# Altium PCB PCB.PcbDoc (part 3 of 3)
Units mm, origin at the board's own origin, x right, y up, seen from the top; angles counter-clockwise.
Board outline 202.56 x 137.16 mm, 4 copper layers (Top Layer, Layer 1, Layer 2, Bottom Layer), stack 0.603 mm thick; 171 components, 95 nets, 481 pads, 76 vias.
Unrouted connection lines stored in the file: 155.
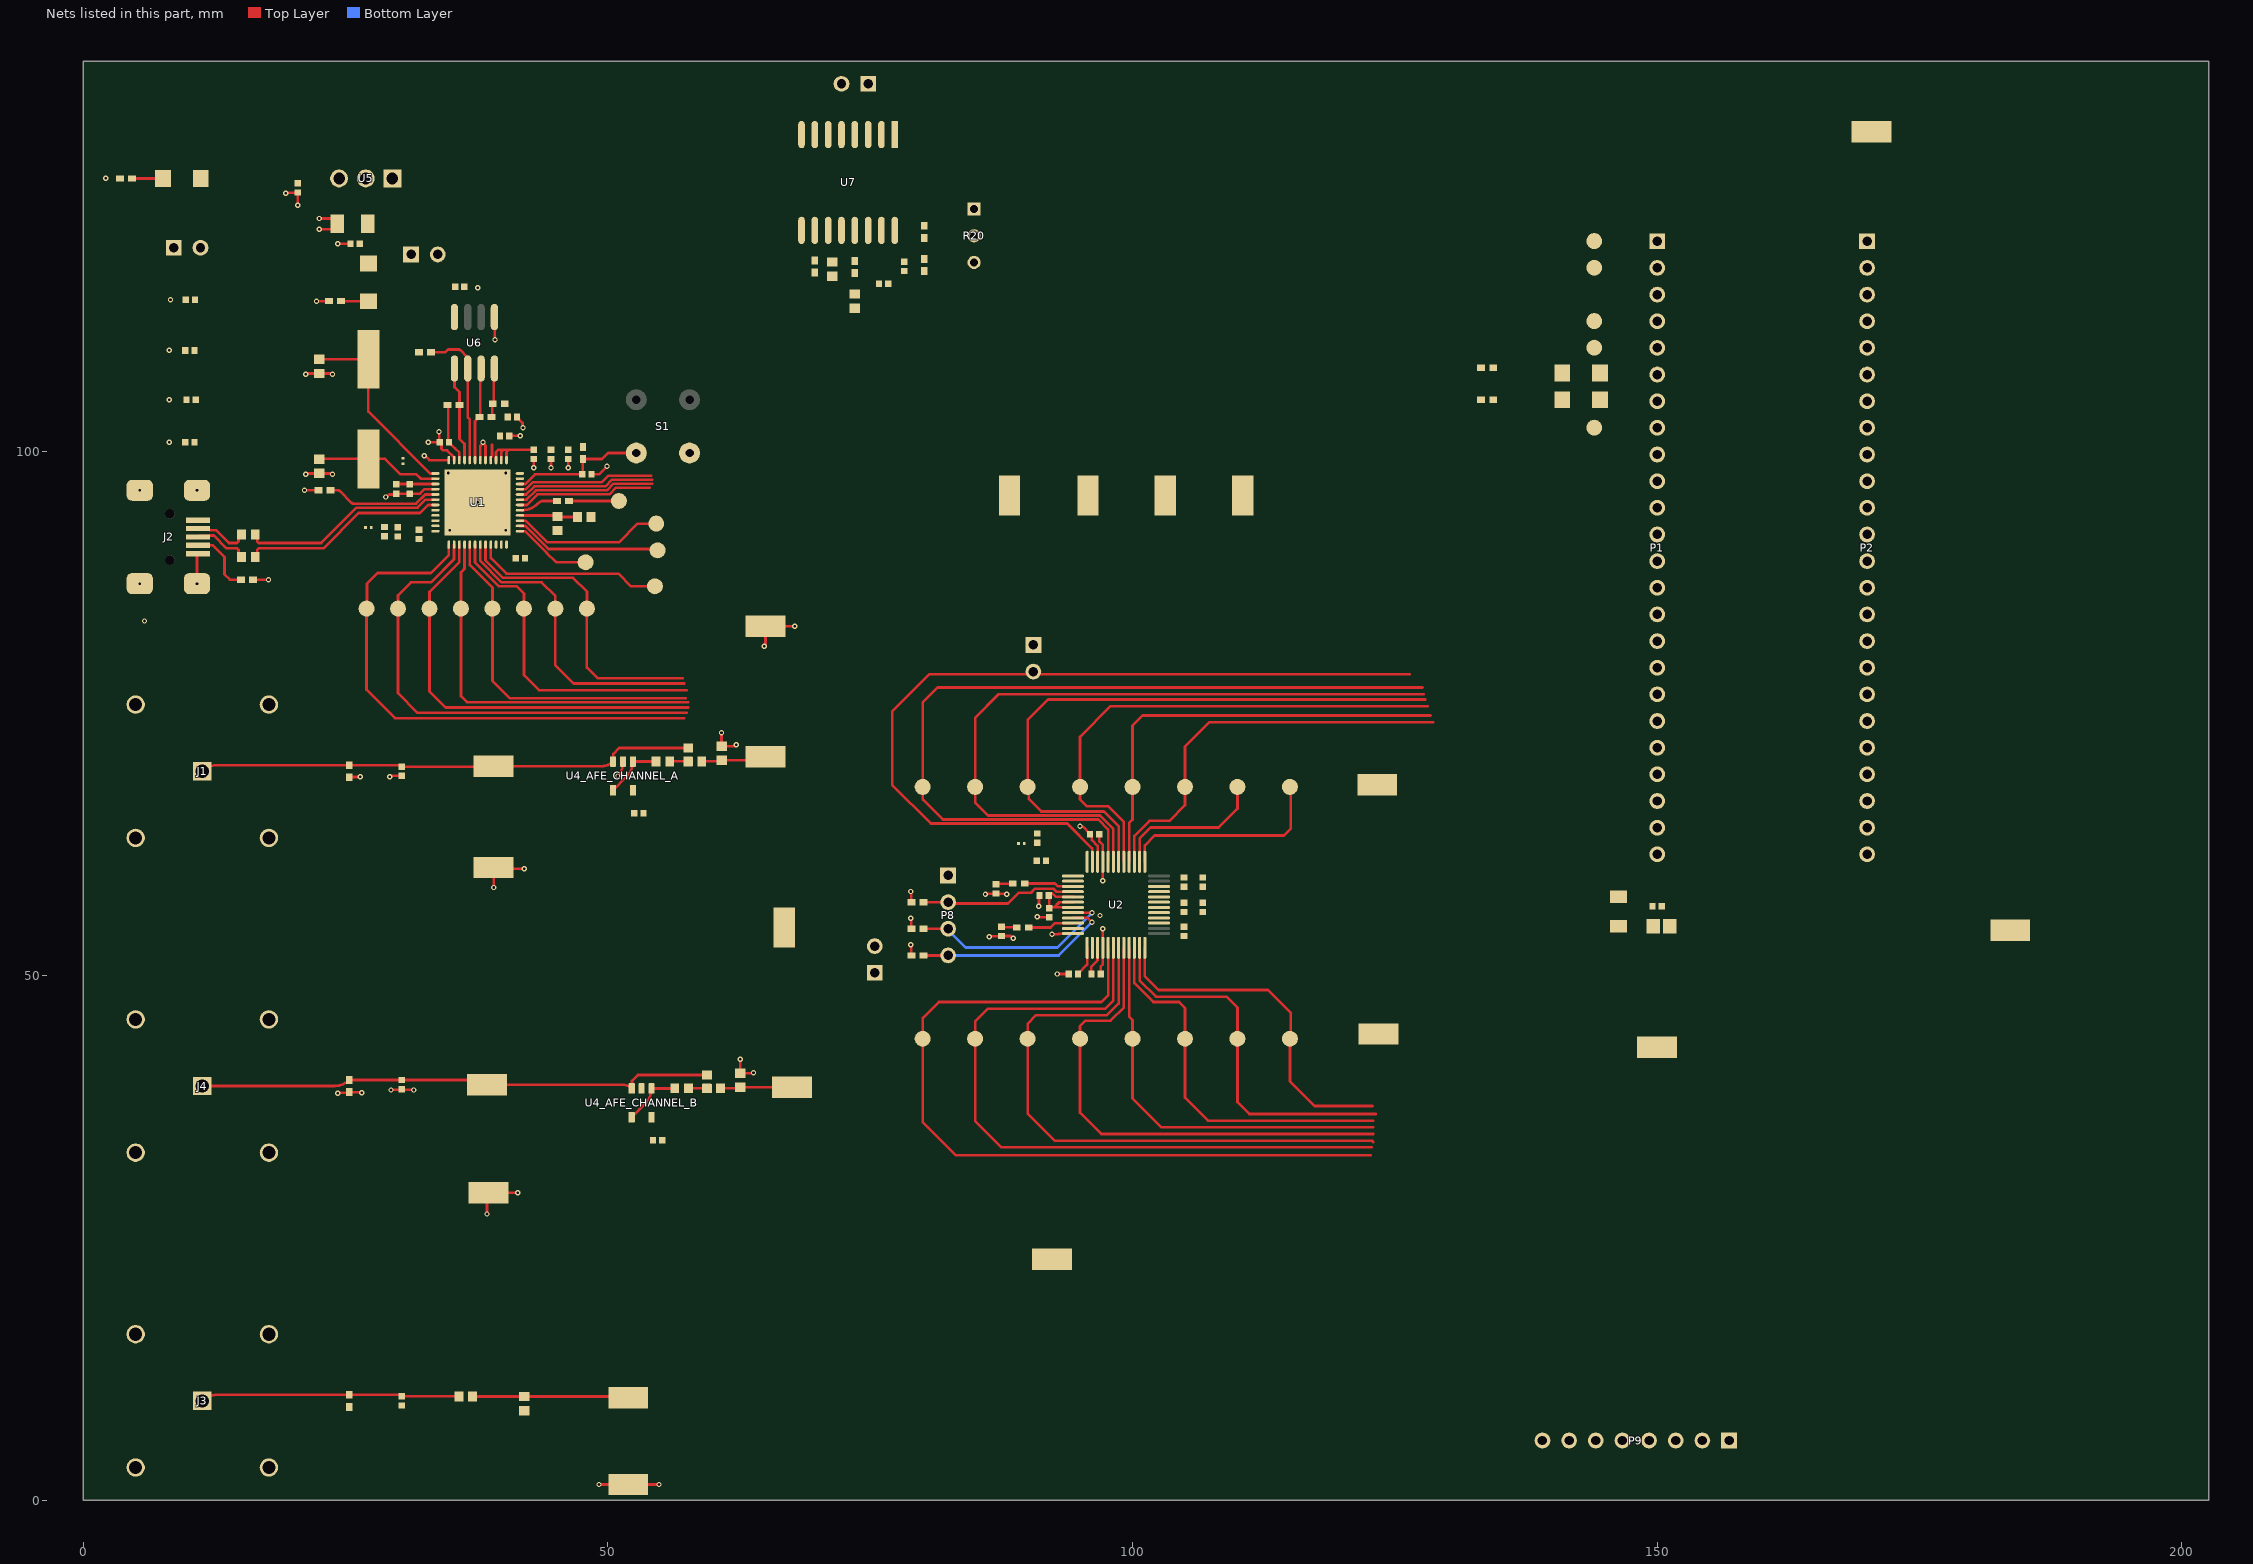
[diagram p4: the nets of this part, all layers, seen from the top]

## Part data (continued)
R22: library part AC0603FR-0775RL, "RES SMD 75 OHM 1% 1/10W 0603", Device Package="0603 (1608 Metric)", manufacturer=Yageo, Operating Temperature="-55°C ~ 155°C", Power (Watts)="0.1W, 1/10W", Ratings=AEC-Q200, Supplier Device Package=0603, Supplier Part Number 1=YAG3630CT-ND, Temperature Coefficient=±100ppm/°C, Tolerance=±1%, componentlink1description=Datasheet, componentlink1url=https://www.yageo.com/upload/media/product/productsearch/datasheet/rchip/PYu-AC_51_RoHS_L_7.pdf, componentlink2description="DigiKey Link", componentlink2url=https://www.digikey.com/en/products/detail/yageo/AC0603FR-0775RL/5896285, Composition="Thick Film", Features="Automotive AEC-Q200, Moisture Resistant", Height - Seated (Max)="0.022\" (0.55mm)", lastupdated="2022-09-18 12:28:42 PM", Lifecycle Status=Active, Minimum Order=1, Number of Terminations=2, Package / Case="0603 (1608 Metric)", packaging=CutTape, Part Number=AC0603FR-0775RL, Part Status=Active, partid=15287, price=0.01, Resistance="75 Ohms", series=AC, Size / Dimension="0.063\" L x 0.031\" W (1.60mm x 0.80mm)", Supplier 1=DigiKey
R26: library part RC0402FR-0724RL, "RES 24 OHM 1% 1/16W 0402", Device Package="0402 (1005 Metric)", manufacturer=Yageo, Operating Temperature="-55°C ~ 155°C", Power (Watts)="0.063W, 1/16W", Supplier Device Package=0402, Supplier Part Number 1=YAG3073CT-ND, Temperature Coefficient=±100ppm/°C, Tolerance=±1%, componentlink1description=Datasheet, componentlink1url=https://www.yageo.com/upload/media/product/productsearch/datasheet/rchip/PYu-RC_Group_51_RoHS_L_10.pdf, componentlink2description="DigiKey Link", componentlink2url=https://www.digikey.com/en/products/detail/yageo/RC0402FR-0724RL/5280933, Composition="Thick Film", Features="Moisture Resistant", Height - Seated (Max)="0.016\" (0.40mm)", lastupdated="2022-09-19 1:15:03 PM", Lifecycle Status=Active, Minimum Order=1, Number of Terminations=2, Package / Case="0402 (1005 Metric)", packaging=CutTape, Part Number=RC0402FR-0724RL, Part Status=Active, partid=2811, price=0.01, Resistance="24 Ohms", series=RC_L, Size / Dimension="0.039\" L x 0.020\" W (1.00mm x 0.50mm)", Supplier 1=DigiKey
R27 R28 R29: library part RMCF0402FT1M00, "RES 1M OHM 1% 1/16W 0402", Device Package="0402 (1005 Metric)", manufacturer="Stackpole Electronics Inc", Operating Temperature="-55°C ~ 155°C", Power (Watts)="0.063W, 1/16W", Ratings=AEC-Q200, Supplier Device Package=0402, Supplier Part Number 1=RMCF0402FT1M00CT-ND, Temperature Coefficient=±100ppm/°C, Tolerance=±1%, componentlink1description=Datasheet, componentlink1url=https://www.seielect.com/catalog/sei-rmcf_rmcp.pdf, componentlink2description="DigiKey Link", componentlink2url=https://www.digikey.com/en/products/detail/stackpole-electronics-inc/RMCF0402FT1M00/1761748, Composition="Thick Film", Features="Automotive AEC-Q200", Height - Seated (Max)="0.016\" (0.40mm)", lastupdated="2022-09-19 1:14:56 PM", Lifecycle Status=Active, Minimum Order=1, Number of Terminations=2, Package / Case="0402 (1005 Metric)", packaging=CutTape, Part Number=RMCF0402FT1M00, Part Status=Active, partid=4912, price=0.01, Resistance="1 MOhms", series=RMCF, Size / Dimension="0.039\" L x 0.020\" W (1.00mm x 0.50mm)", Supplier 1=DigiKey
R30 R31: library part FC0402E25R0BST0, "RES 25 OHM 0.1% 1/20W 0402", Device Package="0402 (1005 Metric)", manufacturer="Vishay Thin Film", Operating Temperature="-55°C ~ 155°C", Power (Watts)="0.05W, 1/20W", Supplier Device Package=0402, Supplier Part Number 1=764-1327-1-ND, Temperature Coefficient=±25ppm/°C, Tolerance=±0.1%, componentlink1description=Datasheet, componentlink1url=http://www.vishay.com/docs/60093/fcseries.pdf, componentlink2description="DigiKey Link", componentlink2url=http://digikey.com/product-detail/en/vishay-thin-film/FC0402E25R0BST0/764-1327-1-ND/7103111, Composition="Thin Film", Features="RF, High Frequency", Height - Seated (Max)="0.015\" (0.38mm)", lastupdated="2022-09-18 12:21:41 PM", Lifecycle Status=Active, Minimum Order=1, Number of Terminations=2, Package / Case="0402 (1005 Metric)", packaging=TapeAndReel, Part Number=FC0402E25R0BST0, Part Status=Active, partid=11457, price=2.00, Resistance="25 Ohms", series=FC, Size / Dimension="0.042\" L x 0.022\" W (1.07mm x 0.56mm)", Supplier 1=DigiKey
S1: "SWITCH PUSH SPST-NO 0.4VA 28V", Color - Actuator/Cap=Black, Current Rating (Amps)="0.4VA (AC/DC)", manufacturer="NKK Switches", Operating Temperature="-30°C ~ 85°C", Supplier Part Number 1=360-2703-ND, Voltage Rating - AC=28V, Actuator Type="Round, Button", Circuit=SPST-NO, componentlink1description=Datasheet, componentlink1url=https://www.nkkswitches.com/pdf/Apushbuttons.pdf, componentlink2description="DigiKey Link", componentlink2url=//digikey.com/product-detail/en/nkk-switches/AB11AH-HA/360-2703-ND/1056050, Features="Sealed - Fully", lastupdated="2019-12-12 8:13:11 AM", Lifecycle Status=0, Minimum Order=1, Mounting Type="Through Hole, Right Angle", packaging=Tray, Part Number=AB11AH-HA, Part Status=Active, price=5.00, series=AB, Supplier 1=DigiKey, Switch Function=Off-Mom, Termination Style="PC Pin", Type=Standard, Voltage Rating - DC=28V
TP1 TP2 TP3 TP4 TP5 TP9 TP24 TP25 TP26 TP45 TP46 TP47 TP48 TP50 TP51 TP52 TP53 TP54 TP55 TP56: library part CMP-1672-00008-1, "Test Point, 1 Position SMD, RoHS, Tape and Reel", Package Quantity=1000, componentlink1description="Manufacturer URL", componentlink1url=http://www.keyelco.com/, componentlink2description=Datasheet, componentlink2url=http://www.keyelco.com/product-pdf.cfm?p=1357, Contact Plating=Silver, DatasheetVersion=03/2014, Mount="Surface Mount", Mounting Technology="Surface Mount", PackageDescription="1-Pin Surface Mount Device, Body 3.81 x 2.03 mm", PackageReference=5019, packaging="Tape and Reel", Pins=1, RoHSCompliant=True
TP6 TP7 TP8 TP10 TP11 TP12 TP13 TP14 TP15 TP16 TP17 TP18 TP19 TP20 TP21 TP27 TP28 TP29 TP30 TP31 TP32 TP33 TP34 TP35 TP36 TP37 TP38 TP39 TP40 TP41 TP42 TP43 TP44 TP49: library part TP1
U1: library part CMP-0078-00034-4, "IC HS USB TO UART/FIFO 48QFN", Case/Package=QFN, Max Operating Temperature=85°C, Max Supply Voltage=3.63V, Min Operating Temperature=-40°C, Min Supply Voltage=2.97V, Nominal Supply Current=60mA, Operating Supply Current=24mA, Operating Supply Voltage=3.3V, Package Quantity=1, Data Rate=12Mbps, Height=1.4mm, Interface=UART, Lead Free="Lead Free", Length=7mm, Mount="Surface Mount", Number of Channels=1, Number of Pins=48, packaging="Tape and Reel", Radiation Hardening=No, REACH SVHC="No SVHC", Weight=0.005309oz, Width=7mm
U2: library part CMP-0313-02378-2, "Dual 8-Bit Analog-to-Digital Converter with Parallel Interface, 40MSPS, -40 to +85 degC, ST-48, Pb-Free, Tray", Generic Part Number=AD9288-40, manufacturer="Analog Devices", Channels=2, componentlink1description="Manufacturer URL", componentlink1url=http://www.analog.com/en/index.html, componentlink2description=Datasheet, componentlink2url=http://www.analog.com/static/imported-files/data_sheets/AD9288.pdf, ComponentLink3Description="Package Specification", ComponentLink3URL=http://www.analog.com/static/imported-files/packages/PKG_PDF/LQFP%28ST%29/ST_48.pdf, ComponentLink4Description="Product URL", ComponentLink4URL=http://www.analog.com/en/analog-to-digital-converters/ad-converters/ad9288/products/product.html, DatasheetVersion=Rev.C, Interface=Par, Mounting Technology="Surface Mount", PackageDescription="48-Pin Thin Quad Flat Pack 0.5 mm Pitch", PackageReference=ST-48, PackageVersion=revA, Packing=Tray, PartNumber=AD9288BSTZ-40, Resolution (Bits)=8, RoHS=Y, Throughput Rate (SPS)=40M
U4_AFE_CHANNEL_A U4_AFE_CHANNEL_B: library part CMP-0055-01272-3, "1.7 GHz, Ultra Low Distortion, Wideband Op Amp, 5-pin SOT-23, Pb-Free", manufacturer="Texas Instruments", Package Reference=DBV0005A, PackageTopMarking=A83A*XTT, PowerWise=Y, componentlink1description="Datasheet URL", componentlink1url=http://www.ti.com/general/docs/lit/getliterature.tsp?genericPartNumber=LMH6702&fileType=pdf, CompType=Amplifiers, PackageDescription="Molded SOT-23, .115 x .063 x .040 in Body, 5 Lead, .0375 in Pitch", PinCount=5, RoHS=Y
U5: library part CMP-0244-00471-1, "Fixed Low Drop Positive Voltage Regulator, 3.3V, 3-Pin TO-220", componentlink1description="Manufacturer URL", componentlink1url=http://www.st.com, componentlink2description=Datasheet, componentlink2url=http://www.st.com/internet/com/TECHNICAL_RESOURCES/TECHNICAL_LITERATURE/DATASHEET/CD00000544.pdf, ComponentLink3Description="Package Specification", ComponentLink3URL=http://www.st.com/internet/com/TECHNICAL_RESOURCES/TECHNICAL_LITERATURE/PACKAGE_INFORMATION/CD00004649.pdf, DatasheetVersion=1/11/2011, PackageDescription="TO, Thru-Hole, Vertical, Heatsink Mounted; 3 In-Line Leads; Pitch 2.54 mm", PackageReference=TO220, PackageVersion=ver3.0
U6: library part CMP-0162-00132-1, "2K, 128x16-bit, 2.5V Microwire Serial EEPROM, 8-Pin SOIC 150mil, Commercial Temperature, Tape and Reel", Code_IPC=SOIC127P600-8, Code_JEDEC=MS-012, ComponentAvailability="Unknown. Contact manufacturer to determine status.", DatasheetVersion="revF, May-2008", PackageDescription="8-Lead Plastic Small Outline (SN) - Narrow, 3.90mm Body [SOIC]", PackageReference=SOIC-SN8, PackageVersion="revBB, Aug-2009"
U7: library part CMP-82923-000050-1, "CURRENT SENSOR", Case/Package=SOIC, Current Sensing=15A, Frequency=120kHz, Max Operating Temperature=125°C, Max Supply Current=16mA, Min Operating Temperature=-40°C, Accuracy=1.6%, Linearity=0.75%, Mount="Surface Mount", Number of Channels=1, Number of Pins=16, packaging="Cut Tape", Polarity=Bidirectional, Response Time=4us, RoHS Compliant=Yes, Sensitivity=90mV/A
Y1: library part ABLS-12.000MHZ-20-B-3-H-T, "CRYSTAL 12.0000MHZ 20PF SMD", ESR (Equivalent Series Resistance)="50 Ohms", Frequency Stability=±35ppm, Frequency Tolerance=±25ppm, Load Capacitance=20pF, manufacturer="Abracon LLC", Operating Mode=Fundamental, Operating Temperature="-20°C ~ 70°C", Package / Case=HC-49/US, Supplier Part Number 1=535-15006-1-ND, componentlink1description=Datasheet, componentlink1url=https://abracon.com/Resonators/abls.pdf, componentlink2description="DigiKey Link", componentlink2url=https://www.digikey.com/en/products/detail/abracon-llc/ABLS-12-000MHZ-20-B-3-H-T/9997914, Frequency="12 MHz", Height - Seated (Max)="0.165\" (4.20mm)", lastupdated="2022-07-21 4:44:16 AM", Lifecycle Status=Active, Minimum Order=1, Mounting Type="Surface Mount", packaging=TapeAndReel, Part Number=ABLS-12.000MHZ-20-B-3-H-T, Part Status=Active, partid=124, price=0.09, series=ABLS, Size / Dimension="0.449\" L x 0.185\" W (11.40mm x 4.70mm)", Supplier 1=DigiKey, Type="MHz Crystal"

## Via types
v1: diameter 0.508, hole 0.254, Top Layer to Bottom Layer, 76 vias

## Nets (pads, with @x,y where several pads share a name; then routed paths per layer and width w, separated by ;. In a path a pad name is that pad's centre, name@x,y a point inside that pad or via, vN(x,y) a via of type N, cw(c..) or ccw(c..) an arc to the next point about the centre after c; other vN are vias at no path point)
AC4: R15.1 R23.1 U1.28 | length 5.5
  Top Layer w0.254: U1.28@41.617,93.873 45.095,93.873 R23.1@45.212,93.756 45.242,93.726 R15.1@47.102,93.726
ADC_A_D0: P2.24 TP6.1 U2.37 | length 20.1
  Top Layer w0.254: U2.37@101.175,60.869 101.175,62.44 102.108,63.373 114.427,63.373 115.062,64.008 115.062,67.938 TP6.1@115,68
ADC_A_D1: P2.23 TP8.1 U2.38 | length 14.8
  Top Layer w0.254: U2.38@100.675,60.869 100.675,63.083 101.727,64.135 108.204,64.135 110,65.931 TP8.1@110,68
ADC_A_D2: P2.22 TP11.1 U2.39 | length 38.7
  Top Layer w0.254: U2.39@100.175,60.869 100.175,63.345 101.6,64.77 103.505,64.77 105,66.265 TP11.1@105,68 105,71.853 107.315,74.168 128.651,74.168
ADC_A_D3: P2.21 TP13.1 U2.40 | length 41.9
  Top Layer w0.254: U2.40@99.675,60.869 99.675,64.556 100,64.881 TP13.1@100,68 100,73.838 100.965,74.803 128.397,74.803
ADC_A_D4: P2.20 TP15.1 U2.41 | length 49.2
  Top Layer w0.254: U2.41@99.175,60.869 99.175,64.655 97.663,66.167 95.631,66.167 94.996,66.802 94.996,67.996 TP15.1@95,68 95,72.775 97.917,75.692 128.143,75.692
ADC_A_D5: P2.19 TP17.1 U2.42 | length 59.3
  Top Layer w0.254: U2.42@98.675,60.869 98.675,64.266 97.282,65.659 91.313,65.659 90.115,66.857 90.115,67.885 TP17.1@90,68 90,74.379 91.948,76.327 127.889,76.327
ADC_A_D6: P2.18 TP19.1 U2.43 | length 69.1
  Top Layer w0.254: U2.43@98.175,60.869 98.175,64.004 96.901,65.278 86.233,65.278 85,66.511 TP19.1@85,68 85,74.586 87.249,76.835 127.762,76.835
ADC_A_D7: P2.17 TP21.1 U2.44 | length 79.4
  Top Layer w0.254: U2.44@97.675,60.869 97.675,63.965 96.743,64.897 81.915,64.897 80.01,66.802 80.01,67.99 TP21.1@80,68 80,76.063 81.407,77.47 127.635,77.47
ADC_A_ENC: P2.12 P5.2 U2.47 | length 80.6
  Top Layer w0.254: U2.47@96.175,60.869 96.175,61.781 96.152,61.804 96.152,62.142 93.778,64.516 80.772,64.516 77.089,68.199 77.089,75.184 80.645,78.74 126.405,78.74
ADC_A_IN: C49_AFE_CHANNEL_A.2 R16_AFE_CHANNEL_A.2 TP50.1 U2.2 | length 6.2
  Top Layer w0.254: R16_AFE_CHANNEL_A.2@58.943,70.445 60.623,70.445 ccw(c60.623,70.742) C49_AFE_CHANNEL_A.2@60.833,70.532 64.218,70.532 ccw(c64.218,71.672) TP50.1@65.024,70.866
ADC_B_D0: P1.12 TP7.1 U2.24 | length 33.4
  Top Layer w0.254: U2.24@101.175,52.669 101.175,49.955 102.489,48.641 112.903,48.641 115.062,46.482 115.062,44.062 TP7.1@115,44 115,39.94 117.348,37.592 122.868,37.592
ADC_B_D1: P1.13 TP10.1 U2.23 | length 36.2
  Top Layer w0.254: U2.23@100.675,52.669 100.675,49.566 102.235,48.006 108.966,48.006 110,46.972 TP10.1@110,44 110,37.955 111.125,36.83 123.19,36.83
ADC_B_D2: P1.14 TP12.1 U2.22 | length 36.6
  Top Layer w0.254: U2.22@100.175,52.669 100.175,49.304 101.981,47.498 104.438,47.498 105,46.936 TP12.1@105,44 105,38.383 107.188,36.195 122.936,36.195
ADC_B_D3: P1.17 TP14.1 U2.21 | length 38.6
  Top Layer w0.254: U2.21@99.675,52.669 99.675,46.121 100,45.796 TP14.1@100,44 100,38.303 102.743,35.56 122.936,35.56
ADC_B_D4: P1.18 TP16.1 U2.20 | length 47.6
  Top Layer w0.254: U2.20@99.175,52.669 99.175,46.978 97.917,45.72 95.504,45.72 95,45.216 TP16.1@95,44 95,36.953 97.028,34.925 122.936,34.925
ADC_B_D5: P1.19 TP18.1 U2.19 | length 57.4
  Top Layer w0.254: U2.19@98.675,52.669 98.675,47.367 97.551,46.243 90.82,46.243 90,45.423 TP18.1@90,44 90,36.873 92.583,34.29 122.809,34.29 122.936,34.163
ADC_B_D6: P1.20 TP20.1 U2.18 | length 67.4
  Top Layer w0.254: U2.18@98.175,52.669 98.175,47.629 97.409,46.863 86.233,46.863 85,45.63 TP20.1@85,44 85,36.158 87.503,33.655 122.809,33.655
ADC_B_D7: P1.21 TP49.1 U2.17 | length 77
  Top Layer w0.254: U2.17@97.675,52.669 97.675,48.145 97.028,47.498 81.534,47.498 80.01,45.974 80.01,44.01 TP49.1@80,44 80,36.078 83.185,32.893 122.682,32.893
ADC_B_ENC: P1.3 P7.2 U2.14
ADC_B_IN: C49_AFE_CHANNEL_B.2 R16_AFE_CHANNEL_B.2 TP51.1 U2.11 | length 6.9
  Top Layer w0.254: R16_AFE_CHANNEL_B.2@60.721,39.283 62.401,39.283 ccw(c62.401,39.58) C49_AFE_CHANNEL_B.2@62.611,39.37 TP51.1@67.564,39.37
ADC_DFS: P8.2 R34.2 U2.4 | length 15
  Top Layer w0.254: R34.2@80.077,57.023 P8.2@82.423,57.023 82.55,56.896 88.138,56.896 89.154,57.912 90.299,57.912 90.692,58.305 92.442,58.305 92.728,58.019 U2.4@94.325,58.019
ADC_S1: P8.3 R32.2 U2.8 | length 20.1
  Top Layer w0.254: R32.2@80.077,54.483 P8.3@82.423,54.483 ; U2.8@94.325,56.019 95.756,56.019 95.768,56.007 v1(96.139,56.007)
  Bottom Layer w0.254: P8.3@82.423,54.483 82.423,54.356 84.074,52.705 92.828,52.705 96.13,56.007 v1(96.139,56.007)
ADC_S2: P8.4 R33.2 U2.9 | length 19.4
  Top Layer w0.254: R33.2@80.077,51.943 P8.4@82.423,51.943 ; U2.9@94.325,55.519 95.729,55.519 96.13,55.118 v1(96.139,55.118)
  Bottom Layer w0.254: P8.4@82.423,51.943 92.964,51.943 v1(96.139,55.118)
EEPROM_CLK: R10.1 U1.44 U6.2 | length 13.7
  Top Layer w0.254: R10.1@33.158,109.436 34.507,109.436 34.762,109.691 35.758,109.691 cw(c35.758,109.437) 35.937,109.618 36.574,108.981 cw(c36.393,108.802) U6.2@36.647,108.803 ; U6.2@36.647,108.802 U6.2@36.647,107.875 36.647,103.192 36.842,102.998 U1.44@36.842,99.148
EEPROM_CS: R11.1 U1.45 U6.1 | length 9.1
  Top Layer w0.254: U6.1@35.377,107.875 35.377,106.101 35.86,105.618 R11.1@35.86,104.394 35.86,101.173 36.342,100.691 U1.45@36.342,99.148
EEPROM_DI: R12.2 U1.43 U6.3 | length 9
  Top Layer w0.254: U1.43@37.342,99.148 37.342,102.835 37.51,103.003 37.51,103.078 37.683,103.251 R12.2@37.758,103.251 37.838,103.331 37.838,107.795 U6.3@37.917,107.875
EEPROM_DO: R9.1 R12.1 U6.4 | length 4.7
  Top Layer w0.254: R12.1@38.908,103.251 38.968,103.311 38.968,104.461 R9.1@39.028,104.521 39.108,104.601 39.108,107.795 U6.4@39.187,107.875
FPGA_ADC0: P1.15 U7.12
FPGA_ADC1: C35.2 P1.16 R22.2 TP9.1 | length 14.9
  Top Layer w0.254: R22.2@37.099,9.906 C35.2@42.037,9.906 51.636,9.906 cw(c51.636,9.472) TP9.1@51.943,9.779
FTDI_AC7: P1.2 TP33.1 U1.31 | length 13.2
  Top Layer w0.254: U1.31@41.617,95.373 42.256,95.373 43.149,96.266 49.911,96.266 50.546,96.901 54.229,96.901
FTDI_AC8: P1.4 TP34.1 U1.32 | length 13.2
  Top Layer w0.254: U1.32@41.617,95.873 41.619,95.875 42.219,95.875 42.991,96.647 49.753,96.647 50.388,97.282 54.229,97.282
FTDI_AC9: P1.5 TP35.1 U1.33 | length 13
  Top Layer w0.254: U1.33@41.617,96.373 41.619,96.375 42.181,96.375 42.834,97.028 49.403,97.028 50.038,97.663 54.102,97.663
FTDI_AD0: P2.9 TP37.1 U1.13 | length 51.5
  Top Layer w0.254: U1.13@34.842,91.098 34.842,90.087 33.147,88.392 28.067,88.392 27.051,87.376 27.051,85.051 TP37.1@27,85 27,77.267 29.718,74.549 57.277,74.549
FTDI_AD1: P2.8 TP38.1 U1.14 | length 45.8
  Top Layer w0.254: U1.14@35.342,91.098 35.342,89.698 33.147,87.503 31.242,87.503 30,86.261 TP38.1@30,85 30,76.934 31.877,75.057 57.531,75.057
FTDI_AD2: P2.7 TP39.1 U1.15 | length 40.5
  Top Layer w0.254: U1.15@35.842,91.098 35.842,89.436 33,86.594 TP39.1@33,85 33,77.109 34.544,75.565 57.658,75.565
FTDI_AD3: P2.6 TP40.1 U1.16 | length 36.5
  Top Layer w0.254: U1.16@36.342,91.098 36.342,88.793 36,88.451 TP40.1@36,85 36,76.649 36.576,76.073 57.658,76.073
FTDI_AD4: P2.5 TP41.1 U1.17 | length 33
  Top Layer w0.254: U1.17@36.842,91.098 36.842,89.142 39,86.984 TP41.1@39,85 39,78.094 40.64,76.454 57.404,76.454
FTDI_AD5: P2.4 TP42.1 U1.18 | length 31.5
  Top Layer w0.254: U1.18@37.342,91.098 37.342,89.404 39.624,87.122 41.318,87.122 42,86.44 TP42.1@42,85 42,78.65 43.434,77.216 57.531,77.216
FTDI_AD6: P2.3 TP43.1 U1.19 | length 29.7
  Top Layer w0.254: U1.19@37.842,91.098 37.842,89.539 39.878,87.503 43.688,87.503 45,86.191 TP43.1@45,85 45,79.587 46.736,77.851 57.277,77.851
FTDI_AD7: P2.2 TP44.1 U1.20 | length 29.2
  Top Layer w0.254: U1.20@38.342,91.098 38.342,89.578 39.996,87.923 46.697,87.923 48.006,86.614 48.006,85.006 TP44.1@48,85 48,79.381 49.022,78.359 57.15,78.359
FTDI_CLK_OUT: P2.16 R26.2 TP29.1 | length 4.8
  Top Layer w0.254: R26.2@46.295,95.25 TP29.1@51.054,95.25
FTDI_OE_n: P1.1 TP32.1 U1.30 | length 13
  Top Layer w0.254: U1.30@41.617,94.873 42.295,94.873 43.299,95.877 50.141,95.877 50.784,96.52 53.975,96.52
FTDI_OSCI: C13.2 U1.1 Y1.2 | length 18.5
  Top Layer w0.254: C13.2@22.479,108.752 22.49,108.763 Y1.2@27.178,108.763 27.178,103.759 33.064,97.873 U1.1@33.567,97.873
FTDI_OSCO: C14.2 U1.2 Y1.1 | length 11.9
  Top Layer w0.254: C14.2@22.479,99.227 22.515,99.263 Y1.1@27.178,99.263 28.753,99.263 30.226,97.79 31.75,97.79 32.167,97.373 U1.2@33.567,97.373
FTDI_RD_n: P2.14 TP27.1 U1.26 | length 14.1
  Top Layer w0.254: U1.26@41.617,92.873 41.619,92.871 42.13,92.871 44.323,90.678 54.61,90.678 TP27.1@54.737,90.551
FTDI_RESET_n: C10.2 R8.1 S1.3 U1.34 | length 13.5
  Top Layer w0.254: U1.34@41.888,96.873 U1.34@41.617,96.873 41.619,96.875 42.142,96.875 43.057,97.79 C10.2@47.566,97.79 47.596,97.82 C10.2@47.596,97.84 ; C10.2@47.556,97.8 C10.2@47.596,97.84 ; S1.3@52.705,99.822 50.012,99.822 49.437,99.247 R8.1@47.625,99.247 47.596,99.218 C10.2@47.596,97.84
FTDI_RXF_n: P2.13 TP31.1 U1.21 | length 18
  Top Layer w0.254: U1.21@38.842,91.098 38.842,89.809 40.332,88.319 51,88.319 52.197,87.122 TP31.1@54.483,87.122
FTDI_TXE_n: P2.11 TP28.1 U1.25 | length 7.5
  Top Layer w0.254: U1.25@41.617,92.373 U1.25@41.617,92.373 42.091,92.371 44.131,90.332 ccw(c44.31,90.511) 44.145,90.318 44.197,90.274 cw(c44.031,90.081) 44.208,90.264 ; 44.208,90.263 45.013,89.48 ccw(c45.19,89.662) 45.19,89.408 TP28.1@47.879,89.408
FTDI_VPHY: C15.2 C16.2 FB1.1 U1.3 | length 3.7
  Top Layer w0.254: C15.2@29.845,96.833 29.883,96.871 33.565,96.871 U1.3@33.567,96.873
FTDI_VPLL: C23.2 C24.2 FB2.1 U1.8
FTDI_WR_n: P2.10 TP30.1 U1.27 | length 14.6
  Top Layer w0.254: U1.27@41.617,93.373 41.619,93.371 42.169,93.371 43.576,91.963 44.227,91.313 51.054,91.313 52.832,93.091 TP30.1@54.61,93.091
GND: C1.1 C2.1 C3.1 C4.1 C5.1 C6.1 C7.1 C8.1 C9.1 C10.1 C11.1 C12.1 C13.1 C14.1 C15.1 C16.1 C17.1 C18.1 C19.1 C20.1 C21.1 C22.1 C23.1 C24.1 C25.1 C26.1 C27.1 C28.1 C29.1 C30.1 C31.1 C32.1 C33.1 C34.1 C35.1 C36_AFE_CHANNEL_A.1 C36_AFE_CHANNEL_B.1 C37.1 C38.1 C39.1 C40.1 C41.1 C42.1 C43.1 C44.1 C45.1 C46.1 C47.1 C48.1 C49_AFE_CHANNEL_A.1 C49_AFE_CHANNEL_B.1 J1.2 J1.3 J1.4 J1.5 J2.5 J2.S J3.2 J3.3 J3.4 J3.5 J4.2 J4.3 J4.4 J4.5 P2.1 P3.1 P4.2 P5.1 P7.1 P8.1 P9.7 P9.8 R3.1 R4.1 R6.1 R7.1 R13.1 R14.1 R20.3 R21.1 R27.1 R28.1 R29.1 R32.1 R33.1 R34.1 S1.1 TP1.1 TP2.1 TP3.1 TP4.1 TP25.1 TP26.1 TP45.1 TP46.1 TP47.1 TP48.1 TP52.1 TP53.1 TP54.1 TP55.1 TP56.1 U1.4 U1.9 U1.10 U1.11 U1.22 U1.23 U1.35 U1.36 U1.41 U1.42 U1.47 U1.48 U1.49 U2.1 U2.12 U2.16 U2.27 U2.29 U2.32 U2.34 U2.45 U4_AFE_CHANNEL_A.2 U4_AFE_CHANNEL_B.2 U5.1 U6.5 U7.9 | length 99.7
  Top Layer w0.254: v1(10.843,87.371) 10.843,90.126 J2.5@10.938,90.221 ; R14.1@16.196,87.757 v1(17.653,87.757) ; v1(19.304,124.587) 19.338,124.621 20.413,124.621 C5.1@20.447,124.655 v1(20.447,123.444) ; v1(21.082,96.266) R7.1@22.412,96.266 ; v1(21.209,97.79) 21.278,97.79 21.365,97.877 C14.1@22.479,97.877 23.593,97.877 23.68,97.79 v1(23.749,97.79) ; v1(21.209,107.315) 21.278,107.315 21.365,107.402 C13.1@22.479,107.402 23.593,107.402 23.68,107.315 v1(23.749,107.315) ; v1(22.225,114.3) R3.1@23.428,114.3 ; v1(22.479,121.158) 23.696,121.158 C6.1@24.204,121.666 23.696,122.174 v1(22.479,122.174) ; v1(24.257,119.761) C12.1@25.468,119.761 ; v1(24.272,38.803) 24.321,38.851 25.278,38.851 R29.1@25.347,38.92 25.376,38.891 26.514,38.891 v1(26.543,38.862) ; R27.1@25.347,68.92 25.368,68.94 26.395,68.94 v1(26.416,68.961) ; v1(28.838,95.631) 28.907,95.631 29.144,95.868 29.76,95.868 C15.1@29.845,95.953 C16.1@31.115,95.953 32.092,95.953 32.512,96.373 U1.4@33.567,96.373 ; v1(29.21,68.961) 29.279,68.961 29.373,69.055 C9.1@30.347,69.055 ; v1(29.337,39.116) 29.371,39.15 31.462,39.15 v1(31.496,39.116) ; v1(32.512,99.568) 32.57,99.568 32.99,99.148 U1.48@34.842,99.148 ; v1(32.893,100.838) C18.1@33.977,100.838 ; v1(33.909,101.854) 33.943,101.82 33.943,100.872 C18.1@33.977,100.838 ; U1.47@35.342,99.148 35.342,99.419 34.685,100.076 34.29,100.076 34.15,100.216 34.15,100.665 C18.1@33.977,100.838 ; U1.42@37.842,99.148 37.842,100.511 v1@38.1,100.769 ; v1(38.1,100.838) v1@38.1,100.769 ; U1.41@38.342,99.148 38.342,100.527 v1@38.1,100.769 ; v1(38.481,27.305) 38.481,29.03 cw(c38.915,29.03) TP25.1@38.608,29.337 v1(41.402,29.337) ; v1(39.116,58.42) TP56.1@39.116,60.325 ccw(c39.423,60.632) 39.423,60.198 v1(42.037,60.198) ; U6.5@39.187,112.775 39.215,112.747 39.215,110.645 v1(39.243,110.617) ; C26.1@40.602,101.434 40.622,101.454 41.637,101.454 v1(41.656,101.473) ; C25.1@41.334,103.251 41.334,103.231 41.861,102.704 41.861,102.284 v1(41.91,102.235) ; U1.36@41.617,97.873 U1.36@41.619,97.871 ; v1(42.926,98.425) C21.1@42.926,99.255 ; v1(44.577,98.425) C20.1@44.577,99.255 ; v1(46.228,98.425) C22.1@46.228,99.255 ; C10.1@48.446,97.79 49.149,97.79 v1(49.911,98.552) ; v1(49.149,1.524) TP26.1@51.943,1.524 v1(54.864,1.524) ; v1(50.935,69.048) ccw(c49.728,70.255) 51.435,70.255 U4_AFE_CHANNEL_A.2@51.435,70.423 ; v1(60.833,73.152) C49_AFE_CHANNEL_A.1@60.833,71.882 61.923,71.882 ccw(c61.923,72.316) v1(62.23,72.009) ; v1(62.611,42.037) C49_AFE_CHANNEL_B.1@62.611,40.72 63.768,40.72 ccw(c63.768,40.88) v1(63.881,40.767) ; v1(64.897,81.407) ccw(c64.59,81.714) 65.024,81.714 TP55.1@65.024,83.312 v1(67.818,83.312) ; v1(78.867,52.959) 78.897,52.929 78.897,51.973 R33.1@78.927,51.943 ; v1(78.867,55.499) 78.897,55.469 78.897,54.513 R32.1@78.927,54.483 ; v1(78.867,58.039) 78.897,58.009 78.897,57.053 R34.1@78.927,57.023 ; v1(85.979,57.785) 86.013,57.819 86.961,57.819 C44.1@86.995,57.853 87.029,57.819 87.977,57.819 v1(88.011,57.785) ; v1(86.36,53.721) 86.394,53.755 87.469,53.755 C45.1@87.503,53.789 88.382,53.789 88.577,53.594 v1(88.646,53.594) ; v1(90.932,55.626) 90.961,55.597 92.046,55.597 C47.1@92.075,55.567 ; v1(91.059,56.642) 91.093,56.676 91.093,57.624 C46.1@91.127,57.658 ; v1(92.329,53.975) 92.964,53.975 92.999,54.01 94.316,54.01 U2.12@94.325,54.019 ; v1(92.837,50.165) C39.1@93.921,50.165 ; C43.1@96.833,63.5 96.833,62.799 97.175,62.457 U2.45@97.175,60.869 97.166,60.86 97.166,59.066 v1(97.155,59.055) ; C42.1@96.96,50.165 96.967,50.172 96.967,50.866 97.175,51.074 U2.16@97.175,52.669 97.166,52.678 97.166,54.472 v1(97.155,54.483)
  other v1: 96.901,55.753 5.842,83.82 5.393,87.371 34.925,92.456 40.259,92.456 37.592,95.123 5.393,96.271 10.843,96.271 34.798,97.917 40.259,97.917 8.186,100.838 8.186,104.902 8.186,109.601 8.313,114.427 37.592,115.57 2.152,126.006
INTERNAL_REF_OUT: C46.2 C47.2 U2.5 U2.6 U2.7 | length 8.1
  Top Layer w0.254: U2.7@94.325,56.519 92.525,56.519 ; U2.6@94.325,57.019 94.316,57.01 93.016,57.01 92.525,56.519 ; U2.5@94.342,57.502 U2.5@94.325,57.519 92.69,57.519 92.356,57.853 92.075,57.853 C47.2@92.075,56.447 92.147,56.519 92.525,56.519
IP+: P6.1 U7.1 U7.2 U7.3 U7.4
IP-: P6.2 U7.5 U7.6 U7.7 U7.8
MOD_V_USB: C7.2 C8.2 P1.24 R5.2
NetC27_2: C27.2 J3.1 R22.1 R28.2 | length 24.6
  Top Layer w0.254: J3.1@11.347,9.495 cw(c12.735,8.107) 12.735,10.07 R28.2@25.347,10.07 30.021,10.07 cw(c30.021,9.609) C27.2@30.347,9.935 35.729,9.935 cw(c35.729,9.836) R22.1@35.799,9.906
NetC29_2: C29.2 C30.2 C37.2 C38.2 C39.2 FB3.2 U2.13 U2.30 U2.31 U2.48 | length 2.9
  Top Layer w0.254: C39.2@94.801,50.165 94.801,50.185 95.675,51.059 U2.13@95.675,52.669
NetC33_2: C33.2 U7.11
NetC34_2: C34.2 R19.1 R20.2 R21.2 U7.15 U7.16
NetC44_2: C44.2 R30.1 | length 1.6
  Top Layer w0.254: C44.2@86.995,58.733 87.029,58.767 88.545,58.767 R30.1@88.579,58.801
NetC45_2: C45.2 R31.1 | length 1.5
  Top Layer w0.254: C45.2@87.503,54.669 87.532,54.64 88.93,54.64 R31.1@88.96,54.61
NetD1_1: D1.1 P1.6
NetD1_2: D1.2 R6.2
NetD2_2: D2.2 R3.2 | length 2.6
  Top Layer w0.254: R3.2@24.578,114.3 27.156,114.3 D2.2@27.178,114.278
NetD3_1: D3.1 P1.7
NetD3_2: D3.2 R13.2
NetD5_2: D5.2 R4.2 | length 3
  Top Layer w0.254: R4.2@4.639,125.984 D5.2@7.598,125.984
NetJ2_4: J2.4 R14.2 | length 6.4
  Top Layer w0.254: J2.4@10.938,91.021 12.357,91.021 13.462,89.916 13.462,88.265 13.97,87.757 R14.2@15.046,87.757
NetR7_2: R7.2 U1.5 | length 10.9
  Top Layer w0.254: R7.2@23.562,96.266 24.279,96.266 cw(c24.279,96.012) 24.457,96.193 25.581,95.069 ccw(c25.759,95.25) 25.758,94.996 31.719,94.996 32.596,95.873 U1.5@33.567,95.873
NetR16_AFE_CHANNEL_A_1: R16_AFE_CHANNEL_A.1 R24_AFE_CHANNEL_A.2 R25_AFE_CHANNEL_A.2 | length 1.8
  Top Layer w0.254: R25_AFE_CHANNEL_A.2@55.895,70.445 57.586,70.445 cw(c57.586,70.343) R24_AFE_CHANNEL_A.2@57.658,70.415
NetR16_AFE_CHANNEL_B_1: R16_AFE_CHANNEL_B.1 R24_AFE_CHANNEL_B.2 R25_AFE_CHANNEL_B.2 | length 1.8
  Top Layer w0.254: R25_AFE_CHANNEL_B.2@57.673,39.283 59.364,39.283 cw(c59.364,39.181) R24_AFE_CHANNEL_B.2@59.436,39.253
NetR17_1: R17.1 U7.13
NetR18_1: R18.1 U7.10
NetR25_AFE_CHANNEL_A_1: R25_AFE_CHANNEL_A.1 U4_AFE_CHANNEL_A.1 U4_AFE_CHANNEL_A.4 | length 5.7
  Top Layer w0.254: U4_AFE_CHANNEL_A.4@50.485,67.673 51.784,68.972 ccw(c50.333,70.423) U4_AFE_CHANNEL_A.1@52.385,70.423 54.542,70.423 ccw(c54.542,70.498) R25_AFE_CHANNEL_A.1@54.595,70.445
NetR25_AFE_CHANNEL_B_1: R25_AFE_CHANNEL_B.1 U4_AFE_CHANNEL_B.1 U4_AFE_CHANNEL_B.4 | length 5.7
  Top Layer w0.254: U4_AFE_CHANNEL_B.4@52.263,36.511 53.562,37.81 ccw(c52.111,39.261) U4_AFE_CHANNEL_B.1@54.163,39.261 56.32,39.261 ccw(c56.32,39.336) R25_AFE_CHANNEL_B.1@56.373,39.283
NetR26_1: R26.1 U1.29 | length 3.6
  Top Layer w0.254: U1.29@41.824,94.376 ccw(c41.838,96.462) 43.312,94.985 ccw(c43.132,95.165) 43.314,94.987 cw(c44.04,94.289) 43.645,95.215 cw(c43.815,94.816) 43.815,95.25 R26.1@45.145,95.25
NetR30_2: R30.2 U2.3 | length 4.7
  Top Layer w0.254: R30.2@89.729,58.801 92.598,58.801 92.88,58.519 U2.3@94.325,58.519
NetR31_2: R31.2 U2.10 | length 4.4
  Top Layer w0.254: R31.2@90.11,54.61 92.202,54.61 92.611,55.019 U2.10@94.325,55.019
SIGA: C9.2 J1.1 R24_AFE_CHANNEL_A.1 R27.2 TP24.1 U4_AFE_CHANNEL_A.3 | length 47.6
  Top Layer w0.254: J1.1@11.347,69.495 cw(c12.735,68.107) 12.735,70.07 R27.2@25.347,70.07 30.021,70.07 cw(c30.021,69.609) C9.2@30.347,69.935 39.015,69.935 ccw(c39.015,70.078) TP24.1@39.116,69.977 49.408,69.977 ccw(c49.408,71.5) U4_AFE_CHANNEL_A.3@50.485,70.423 50.515,70.453 50.515,71.155 51.074,71.715 R24_AFE_CHANNEL_A.1@57.658,71.715
SIGB: C28.2 J4.1 R24_AFE_CHANNEL_B.1 R29.2 TP5.1 U4_AFE_CHANNEL_B.3 | length 49.4
  Top Layer w0.254: J4.1@11.347,39.495 23.959,39.495 ccw(c23.959,41.458) R29.2@25.347,40.07 30.341,40.07 C28.2@30.347,40.064 37.419,40.064 cw(c37.419,38.562) TP5.1@38.481,39.624 51.387,39.624 cw(c51.387,38.385) U4_AFE_CHANNEL_B.3@52.263,39.261 52.293,39.291 52.293,39.993 52.852,40.553 R24_AFE_CHANNEL_B.1@59.436,40.553
SIWU_n: P1.8 R15.2 TP36.1
SPARE_PIN0: P1.22 P9.1
SPARE_PIN1: P1.23 P9.2
SPARE_PIN2: P2.15 P9.3
SPARE_PIN3: P1.9 P9.4
SPARE_PIN4: P1.10 P9.5
SPARE_PIN5: P1.11 P9.6
USB_D_N: R1.2 U1.6 | length 19.5
  Top Layer w0.254: R1.2@16.398,92.075 16.578,91.895 16.578,91.398 16.726,91.249 22.669,91.249 26.035,94.615 31.877,94.615 32.635,95.373 U1.6@33.567,95.373
USB_D_P: R2.2 U1.7 | length 19.5
  Top Layer w0.254: R2.2@16.398,89.916 16.578,90.096 16.578,90.593 16.726,90.742 22.88,90.742 26.245,94.107 32.087,94.107 32.853,94.873 U1.7@33.567,94.873
USB_MICRO_D_N: J2.2 R1.1 | length 5.3
  Top Layer w0.254: J2.2@10.938,92.621 11.061,92.498 12.062,92.498 12.085,92.475 12.654,92.475 13.88,91.249 14.651,91.249 14.8,91.398 14.8,91.777 R1.1@15.098,92.075
USB_MICRO_D_P: J2.3 R2.1 | length 5.3
  Top Layer w0.254: J2.3@10.938,91.821 11.061,91.944 12.062,91.944 12.085,91.967 12.444,91.967 13.67,90.742 14.651,90.742 14.8,90.593 14.8,90.214 R2.1@15.098,89.916
VBUS_USB: C1.2 C2.2 C3.2 C4.2 C5.2 C31.2 C32.2 D5.1 J2.1 P3.2 R5.1 R17.2 R18.2 R19.2 U5.3 U7.14
VCC3V3: C6.2 C11.2 C12.2 C17.2 C18.2 C19.2 C20.2 C21.2 C22.2 C25.2 C26.2 C36_AFE_CHANNEL_A.2 C36_AFE_CHANNEL_B.2 C40.2 C41.2 C42.2 C43.2 C48.2 D2.1 FB1.2 FB2.2 FB3.1 P4.1 R8.2 R9.2 R10.2 R11.2 R20.1 R23.2 U1.12 U1.24 U1.37 U1.38 U1.39 U1.40 U1.46 U2.15 U2.28 U2.33 U2.46 U4_AFE_CHANNEL_A.5 U4_AFE_CHANNEL_B.5 U5.2 U6.8 | length 20.8
  Top Layer w0.254: R11.2@34.71,104.394 34.784,104.32 34.784,100.911 C18.2@34.857,100.838 34.857,100.818 35.426,100.249 35.446,100.249 35.842,99.853 U1.46@35.842,99.148 ; U1.40@38.842,99.148 38.842,99.419 38.957,99.534 38.957,100.597 ; U1.39@39.342,99.148 39.342,99.921 39.556,100.135 40.064,100.135 ; U1.38@39.842,99.148 39.844,99.15 39.844,99.915 40.064,100.135 ; U1.37@40.342,99.148 40.342,99.905 40.572,100.135 ; C21.2@42.926,100.135 40.572,100.135 ; v1(94.996,64.262) 95.045,64.213 95.26,64.213 95.953,63.52 C43.2@95.953,63.5 96.126,63.327 96.126,62.927 96.675,62.378 U2.46@96.675,60.869 ; C42.2@96.08,50.165 96.08,50.866 96.666,51.452 96.666,52.66 U2.15@96.675,52.669 ; 40.064,100.135 40.572,100.135
pads on no net: J2.M S1.2 S1.4 U2.25 U2.26 U2.35 U2.36 U6.6 U6.7

## Polygon pours and split planes (outlines as drawn)
GND on Layer 1 "GND_L02_P000" (solid, remove dead copper, pour order 0): 0,137.16 0,0 202.565,0 202.565,137.16
GND on Layer 2 "GND_L03_P001" (solid, remove dead copper, pour order 1): 0,137.16 0,0 202.565,0 202.565,137.16
GND on Top Layer "GND_L01_P015" (solid, pour order 15): 46.729,99.555 42.024,99.555 41.148,98.679 41.148,97.155 42.114,97.155 42.117,97.152 43.136,98.171 46.735,98.171
VCC3V3 on Top Layer "Top Layer-VCC3V3" (solid, remove dead copper, pour order 14): 29.612,116.84 29.825,103.632 35.285,103.632 35.285,105.124 32.595,109.149 32.583,109.161 32.583,110.744 35.45,110.744 35.885,111.179 35.885,116.159 35.56,116.484 35.56,117.221 32.512,117.221 32.508,117.39 32.512,117.475 32.512,120.015 38.862,120.015 39.657,119.22 39.657,103.967 39.738,103.886 42.426,103.886 42.426,99.875 42.553,99.822 48.768,99.822 48.768,122.428 48.133,123.063 31.75,123.063 27.559,127.254 25.781,127.254 25.781,120.783 25.908,119.761 25.908,118.999 26.058,118.551 26.058,116.84
VCC3V3 on Top Layer "VCC3V3_L01_P012" (solid, pour order 12): 39.603,105.071 40.828,105.071 40.828,102.1 39.178,100.45 39.178,99.83 38.769,99.83 38.769,102.1 39.603,102.933
GND on Top Layer "GND_L01_P010" (solid, remove dead copper, pour order 10): 9.652,120.904 10.16,120.396 10.16,99.314 6.604,99.314 1.651,104.267 1.651,127.254 3.937,127.254 4.064,127.127 4.064,125.222
VBUS_USB on Top Layer "Top Layer-VBUS_USB" (solid, remove dead copper, pour order 6): 9.525,92.964 13.335,92.964 15.748,95.377 15.748,125.095 20.947,125.095 21.328,124.714 25.4,124.714 25.527,124.841 25.527,127.127 10.287,127.127 10.287,100.584 12.192,98.171 12.192,95.308 9.525,93.853
IP- on Top Layer "IP-_L01_P003" (solid, remove dead copper, pour order 3): 73.215,136.27 73.216,128.016 68.961,128.016 68.072,128.905 68.072,133.35 70.995,136.273
IP+ on Top Layer "IP+_L01_P002" (solid, remove dead copper, pour order 2): 73.406,136.269 73.406,132.08 73.025,131.699 73.025,128.24 73.249,128.016 77.274,128.016 78.105,128.847 78.105,134.239 76.071,136.273